# EAGLE board picoavr (EAGLE 6.5.0)
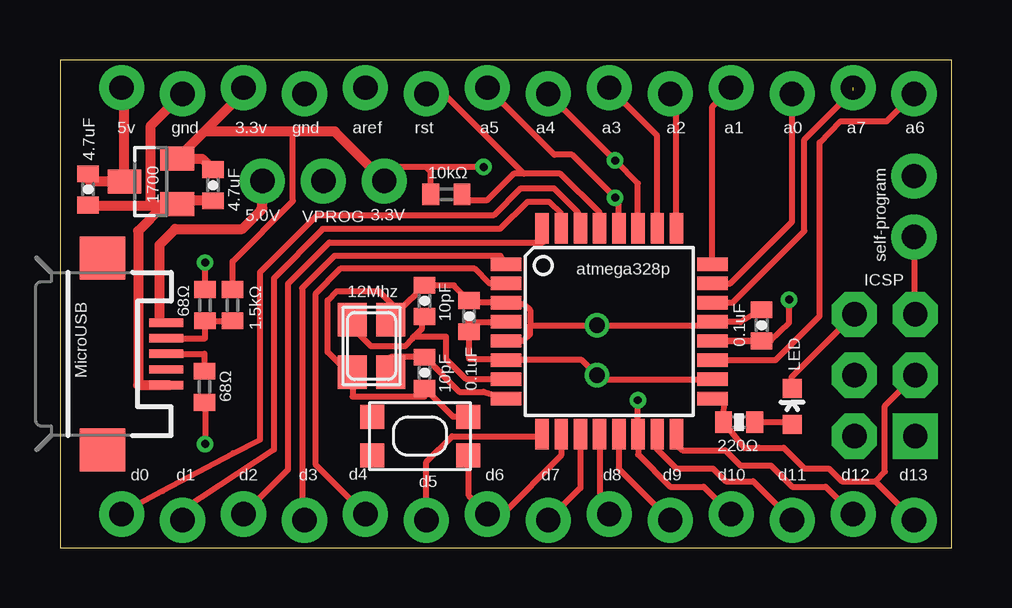
[diagram p0: board, top side]
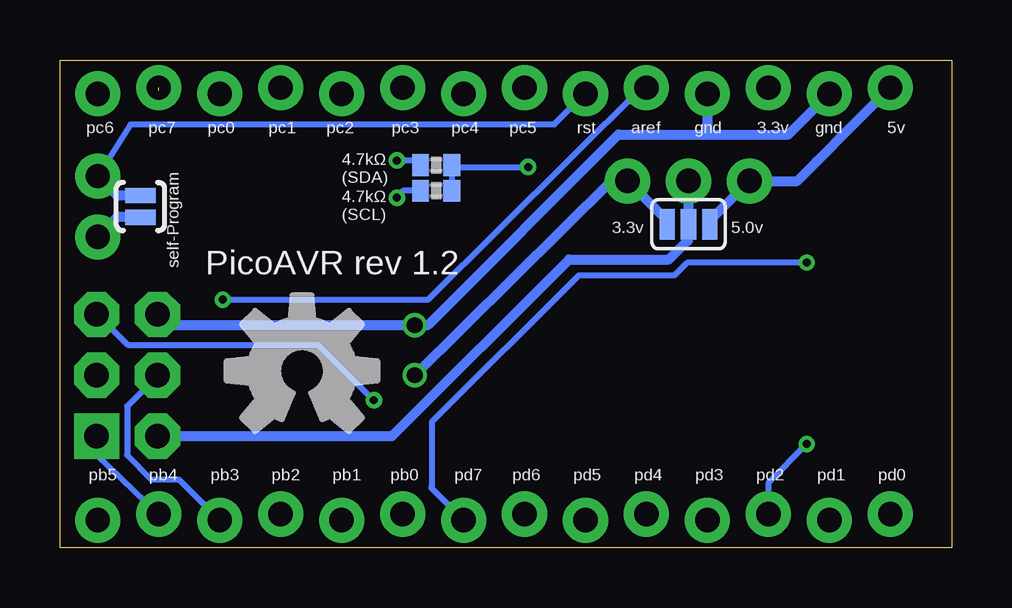
[diagram p1: board, bottom side, seen from below]

Size 37.16 x 20.34 mm. Coordinates in mm from the lower left corner, seen from the top.
Outline: 0,0 37.16,0 37.16,20.34 0,20.34 0,0
Copper layers (1*16): Top 0.0356mm / dielectric 1.5011mm / Bottom 0.0356mm
Design rules "LaenPCBOrder": minimum track width 6mil, minimum drill 13mil, track to track 6mil, track to pad 6mil, pad to pad 6mil, via to via 6mil, smd to smd 6mil, copper to edge 15mil, drill to drill 6mil, minimum pad ring 7mil, minimum via ring 7mil, stop-mask expansion 3mil, vias tented up to drill 0mil, thermal gap 10mil

## Footprints (pad centres in the part's own frame; a part is rotated, then mirrored left to right if it is on the bottom)
0402-CAP = smd 0.7 x 0.9: 1 -0.65,0; 2 0.65,0
SOT23 = smd 1 x 1.4: 1 -0.95,-1.1; 2 0.95,-1.1; 3 0,1.1
1X14_LOCK = drill 1.016 pad 1.88: 1 0,0.127; 2 2.54,-0.127; 3 5.08,0.127; 4 7.62,-0.127; 5 10.16,0.127; 6 12.7,-0.127; 7 15.24,0.127; 8 17.78,-0.127; 9 20.32,0.127; 10 22.86,-0.127; 11 25.4,0.127; 12 27.94,-0.127; 13 30.48,0.127; 14 33.02,-0.127
2X3-NS = drill 1.016 pad 1.88 square: 1 -2.54,-1.27 | drill 1.016 pad 1.88 octagon: 2 -2.54,1.27; 3 0,-1.27; 4 0,1.27; 5 2.54,-1.27; 6 2.54,1.27
LED-0603 = smd 0.8 x 0.8: A 0,-0.75; C 0,0.75
1X03_NO_SILK = drill 1.016 pad 1.88: 1 0,0; 2 2.54,0; 3 5.08,0
NX3225 = smd 1.4 x 1.2: 1 -1.1,-0.8; 2 1.1,-0.8; 3 1.1,0.8; 4 -1.1,0.8
0402-RES = smd 0.7 x 0.9: 1 -0.65,0; 2 0.65,0
R0402 = smd 0.7 x 0.9: 1 -0.65,0; 2 0.65,0
1X02 = drill 1.016 pad 1.88: 1 0,0; 2 2.54,0
SJ_3 = smd 0.635 x 1.27: 1 -0.889,0; 2 0,0; 3 0.889,0
SJ_2S-NO = smd 0.635 x 1.27: 1 -0.45,0; 2 0.45,0
KMR2 = smd 1 x 1: 1 2,0.8; 2 2,-0.8; 3 -2,0.8; 4 -2,-0.8
TQFP32-08 = smd 1.27 x 0.559: 1 -4.293,2.8; 2 -4.293,2; 3 -4.293,1.2; 4 -4.293,0.4; 5 -4.293,-0.4; 6 -4.293,-1.2; 7 -4.293,-2; 8 -4.293,-2.8; 17 4.293,-2.8; 18 4.293,-2; 19 4.293,-1.2; 20 4.293,-0.4; 21 4.293,0.4; 22 4.293,1.2; 23 4.293,2; 24 4.293,2.8 | smd 0.559 x 1.27: 9 -2.8,-4.293; 10 -2,-4.293; 11 -1.2,-4.293; 12 -0.4,-4.293; 13 0.4,-4.293; 14 1.2,-4.293; 15 2,-4.293; 16 2.8,-4.293; 25 2.8,4.293; 26 2,4.293; 27 1.2,4.293; 28 0.4,4.293; 29 -0.4,4.293; 30 -1.2,4.293; 31 -2,4.293; 32 -2.8,4.293
USB-MICROB = smd 0.35 x 1.4: D+ 0,2.65; D- -0.65,2.65; GND 1.3,2.65; ID 0.65,2.65; VBUS -1.3,2.65 | smd 1.8 x 1.9: MT1 -4,0; MT2 4,0

## Placement (x,y rotation side)
C1  4.7uF  [0402-CAP]  1.17,14.94 270 top
C2  4.7uF  [0402-CAP]  6.38,15.11 270 top
C3  10pf  [0402-CAP]  15.19,10.29 90 top
C4  10pf  [0402-CAP]  15.19,7.29 270 top
C5  0.1uF  [0402-CAP]  17.04,9.65 90 top
C6  0.1uF  [0402-CAP]  29.24,9.27 90 top
IC1  MCP1703CB  [SOT23]  3.78,15.27 90 top
JP2  M14LOCK  [1X14_LOCK]  2.57,1.27 0 top
JP3  M14LOCK  [1X14_LOCK]  2.57,19.05 0 top
JSP  [2X3-NS]  34.37,7.19 90 top
LED2  GREEN  [LED-0603]  30.51,5.89 0 top
POWER  [1X03_NO_SILK]  8.43,15.29 0 top
Q2  12mhz  [NX3225]  12.98,8.41 270 top
R1  4.7k  [0402-RES]  21.49,15.95 180 bottom
R2  4.7k  [0402-RES]  21.49,14.88 180 bottom
R3  68  [R0402]  6.05,10.11 90 top
R5  68  [R0402]  6.02,6.71 270 top
R6  10k  [R0402]  16.1,14.73 0 top
R7  1.5k  [R0402]  7.19,10.11 90 top
R9  220  [0402-RES]  28.3,5.23 0 top
SELF_PROGRAM  [1X02]  35.59,15.49 270 top
SJ1  [SJ_3]  10.97,13.49 180 bottom
SJ2  SOLDERJUMPERNO  [SJ_2S-NO]  33.81,14.22 270 bottom
SW1  SPST_TACT-KMR2  [KMR2]  15,4.65 0 top
U3  ATMEGA328P  [TQFP32-08]  22.89,9.02 0 top
X1  Micro USB  [USB-MICROB]  1.78,8.08 270 top

## Library data of the parts
C1 C2 LED2 R1 R2 R9 X1 = SparkFun
C3-C6 = SparkFun-Capacitors
IC1 = linear
JP2 JP3 JSP POWER = SparkFun-Connectors
Q2 SW1 = adafruit
R3 R5-R7 = resistor
SELF_PROGRAM SJ1 SJ2 = SparkFun-Passives
U3 = SparkFun-DigitalIC; PROD_ID: IC-09069

## Nets
A0: JP3.12 U3.23
A1: JP3.11 U3.24
A2: JP3.10 U3.25
A3: JP3.9 U3.26
A6: JP3.14 U3.19
A7: JP3.13 U3.22
AREF: C6.1 JP3.5 U3.20
B0: JP2.9 U3.12
B1: JP2.10 U3.13
D0: JP2.1 U3.30
D1: JP2.2 U3.31
D3: JP2.4 U3.1
D4: JP2.5 U3.2
D5: JP2.6 U3.9
D6: JP2.7 SW1.2 U3.10
GND: C1.2 C2.2 C3.2 C4.2 C5.2 C6.2 IC1.1 JP3.2 JP3.4 JSP.6 LED2.C Q2.2 Q2.4 SW1.1 U3.3 U3.5 U3.21 X1.GND
ISP_RESET: JP2.11 JSP.5 SELF_PROGRAM.2 SJ2.2 U3.14
MISO: JP2.13 JSP.1 U3.16
MOSI: JP2.12 JSP.4 U3.15
N$2: R5.1 X1.D+
N$4: R3.1 R7.1 X1.D-
N$5: C4.1 Q2.3 U3.8
N$6: C3.1 Q2.1 U3.7
N$11: LED2.A R9.2
RESET: JP3.6 R6.2 SELF_PROGRAM.1 SJ2.1 U3.29
SCK: JP2.14 JSP.3 R9.1 U3.17
SCL: JP3.7 R2.2 U3.28
SDA: JP3.8 R1.2 U3.27
USB_DMINUS: JP2.8 R3.2 U3.11
USB_DPLUS: JP2.3 R5.2 U3.32
USB_VBUS: C1.1 IC1.3 JP3.1 POWER.1 SJ1.1 X1.VBUS
VCC: C2.1 C5.1 IC1.2 JP3.3 POWER.3 R1.1 R2.1 R6.1 R7.2 SJ1.3 U3.4 U3.6 U3.18
VPROG: JSP.2 POWER.2 SJ1.2

## Tracks (layer width: path | path; a pad name or v marks a point on that pad's centre or on a via)
A0
  Top 0.254: U3.23 27.93,11.02 30.51,13.59 JP3.12
A1
  Top 0.254: U3.24 27.18,18.39 JP3.11
A2
  Top 0.254: U3.25 25.69,18.92 JP3.10
A3
  Top 0.254: U3.26 24.89,17.18 JP3.9
A6
  Top 0.254: U3.19 29.81,7.82 31.65,9.65 31.65,16.89 32.51,17.78 34.44,17.78 JP3.14
A7  (1 unrouted)
  Top 0.254: U3.22 28.02,10.22 31.01,13.21 31.01,17.02 33.05,19.05
AREF  (via drill 0.33)
  Top 0.254: C6.1 29.61,8.62 U3.20 26.95,8.64 29.62,8.64 30.38,9.37 v30.38,10.34
  Bottom 0.254: JP3.5 12.93,19.18 21.82,10.34 v30.38,10.34
B0
  Top 0.254: U3.12 22.49,1.42 JP2.9
B1
  Top 0.254: U3.13 23.29,3.28 JP2.10
D0
  Top 0.254: JP2.1 2.84,1.6 4.27,2.36 7.21,3.94 8.33,4.5 8.33,11.48 10.72,13.87 18.08,13.87 19.2,14.99 20.57,14.99 21.56,13.99 21.62,13.38 U3.30
D1
  Top 0.254: JP2.2 5.13,1.63 8.92,4.09 8.92,11.23 10.95,13.28 18.31,13.28 19.48,14.43 20.37,14.43 20.88,13.92 U3.31 20.85,13.34
D3
  Top 0.254: U3.1 18.46,11.68 18.46,11.89 18.36,12.17 11.43,12.17 10.08,10.82 10.08,1.17 JP2.4
D4
  Top 0.254: U3.2 17.89,11.02 17.27,11.63 11.68,11.63 10.64,10.57 10.64,3.48 JP2.5
D5
  Top 0.254: JP2.6 15.27,3.58 16.33,4.65 20.06,4.65 U3.9
D6
  Top 0.254: U3.10 20.89,3.84 18.44,1.4 JP2.7 17.04,2.16 17.04,3.81 SW1.2
GND  (via drill 0.66)
  Top 0.254: C6.2 29.25,9.92 28.35,9.4 27.2,9.4 U3.21 | 4.57,6.78 X1.GND | 19.58,9.27 19.58,9.91 19.33,10.16 18.82,10.16 U3.3 17.38,10.22 C5.2 16.41,10.94 C3.2 14.11,9.86 | U3.5 18.82,8.64 19.33,8.64 19.58,8.89 19.58,9.27 | 26.95,9.4 U3.21 | JSP.6 30.48,7.11 30.48,6.64 LED2.C | C4.2 14.87,6.64 | 12.19,7.29 Q2.2 | Q2.4 13.78,9.53 14.11,9.86 | 12.19,7.29 12.01,7.29 11.15,8.15 11.15,10.31 11.53,10.69 13.28,10.69 14.11,9.86 | 19.58,9.27 v22.38,9.27 27.18,9.27 U3.21 | C1.2 1.24,14.11 1.4,14.26 | 4.88,14.11 IC1.1 | IC1.1 4.38,14.29 | 5.09,14.46 IC1.1 | 12.19,7.29 12.19,6.3 15.19,6.3 C4.2 | SW1.1 16.38,5.45 C4.2
  Top 0.406: 4.57,6.78 3.25,6.78 3.25,13.21 4.31,14.26 | 4.38,14.29 3.78,14.3 3.78,17.6 JP3.2 | C2.2 5.09,14.46 | 4.31,14.26 4.36,14.31 IC1.1 | 1.4,14.26 4.31,14.26
  Bottom 0.152: 22.38,9.4 v22.38,9.27
  Bottom 0.406: JSP.6 32.64,9.27 v22.38,9.27 21.84,9.27 13.89,17.22 10.19,17.22 | 10.19,17.22 6.81,17.22 JP3.2 | JP3.4 10.19,17.22
ISP_RESET  (via drill 0.33)
  Top 0.254: JP2.11 26.82,2.54 25.43,2.54 24.09,3.88 U3.14 24.08,4.83 v24.08,6.15 | SELF_PROGRAM.2 35.59,9.78 JSP.5
  Bottom 0.254: JSP.5 34.34,8.46 26.39,8.46 v24.08,6.15
  Bottom 0.406: SJ2.2 34.77,13.77 SELF_PROGRAM.2
MISO
  Top 0.254: U3.16 25.69,4.31 25.93,4.06 27.71,4.06 28.35,3.43 29.62,3.43 30.51,2.54 31.9,2.54 JP2.13
  Bottom 0.254: JP2.13 35.64,3.86 JSP.1
MOSI
  Top 0.254: U3.15 24.89,4.1 25.68,3.3 27.2,3.3 27.74,2.77 28.88,2.77 JP2.12
  Bottom 0.254: JSP.4 33.1,7.16 34.37,5.89 34.37,3.86 33.35,2.85 32.21,2.85 JP2.12
N$2
  Top 0.254: X1.D+ 6.02,8.08 R5.1
N$4
  Top 0.254: X1.D- 6.05,8.73 R3.1 R7.1 7.21,9.46
N$5
  Top 0.254: U3.8 17.65,6.5 16.63,6.5 C4.1 13.78,7.94 Q2.3
N$6
  Top 0.254: 15.19,9.45 C3.1 15.09,9.54 15.09,9.14 14.76,8.81 | U3.7 18.57,7.04 16.92,7.04 16.08,7.87 16.08,8.79 14.78,8.79 14.76,8.81 | Q2.1 12.18,9.18 12.95,8.41 14.38,8.41 14.68,8.71 14.68,8.74 14.76,8.81
N$11
  Top 0.254: R9.2 30.51,5.23 LED2.A
RESET
  Top 0.152: 16.08,18.85 16.03,18.8 15.27,18.8 JP3.6
  Top 0.254: U3.29 22.49,13.96 20.85,15.6 19.33,15.6 | 19.33,15.6 18.9,15.6 17.78,14.48 17.01,14.48 R6.2 | 15.39,18.92 16,18.92 16.08,18.85 19.33,15.6
  Bottom 0.254: SELF_PROGRAM.1 34.21,17.65 16.56,17.65 JP3.6
  Bottom 0.406: SJ2.1 34.77,14.67 SELF_PROGRAM.1
SCK
  Top 0.254: U3.17 27.65,6.32 R9.1 28.51,4.16 29.13,4.17 30.15,4.17 31.01,3.3 32.03,3.3 32.56,2.77 33.96,2.77 | 33.96,2.77 JP2.14 | JSP.3 34.37,5.92 34.37,3.17 33.96,2.77
SCL  (via drill 0.33)
  Top 0.254: U3.28 23.29,14.43 v23.13,14.59 21.34,16.38 20.6,16.38 JP3.7
  Bottom 0.254: R2.2 22.86,14.88 v23.13,14.59
SDA  (via drill 0.33)
  Top 0.254: JP3.8 v23.13,16.14 24.08,15.19 U3.27
  Bottom 0.254: R1.2 22.18,16.14 v23.13,16.14
USB_DMINUS  (via drill 0.33)
  Top 0.254: U3.11 21.69,2.48 JP2.8 | R3.2 v6.05,11.89
  Bottom 0.254: JP2.8 21.69,2.48 21.69,2.49 | 21.69,2.49 21.69,2.54 21.67,2.55 21.67,2.48 21.69,2.49 | v6.05,11.89 11.02,11.89 11.56,11.35 15.54,11.35 21.64,5.26 21.67,5.26 21.67,2.66 21.69,2.49
USB_DPLUS  (via drill 0.33)
  Top 0.254: U3.32 20.09,13.7 20.12,12.72 11.23,12.72 9.5,11 9.5,3.25 JP2.3 | 6,4.31 v6.05,4.32 6.05,5.7 R5.2
  Bottom 0.254: v6.05,4.32 7.65,2.69 JP2.3
USB_VBUS
  Top 0.254: 4.14,9.46 X1.VBUS | 1.23,15.27 C1.1 | 2.68,19.06 JP3.1
  Top 0.406: 4.14,9.46 4.14,12.62 4.8,13.28 7.59,13.28 8.38,14.07 8.38,14.1 8.43,14.15 POWER.1 | 1.23,15.27 IC1.3 2.68,19.06
  Bottom 0.152: 4.09,17.53 4.15,17.59 | 8.31,15.29 POWER.1 | 5.61,16 5.64,16.1
  Bottom 0.254: 8.43,15.14 POWER.1
  Bottom 0.406: JP3.1 4.15,17.59 5.64,16.1 6.45,15.29 8.31,15.29 | SJ1.1 10.08,13.64 POWER.1
VCC  (via drill 0.33, 0.66)
  Top 0.254: U3.4 17.01,9.41 C5.1 17.04,7.87 18.57,7.87 U3.6 21.74,7.82 v22.38,7.19 22.56,7.01 U3.18 | 6.25,15.77 6.25,15.89 C2.1 | R7.2 7.19,11.94 9.7,14.45 9.7,17.35 | v17.65,15.88 15.27,15.88 | 15.27,15.88 14.1,15.88 POWER.3 | R6.1 15.45,15.69 15.27,15.88
  Top 0.406: JP3.3 7.65,18.97 7.64,18.97 6.02,17.35 | POWER.3 11.46,17.35 9.7,17.35 6.02,17.35 | IC1.2 4.88,16.42 | IC1.2 5.92,16.21 C2.1 | 6.02,17.35 IC1.2
  Bottom 0.254: 13.51,15.14 POWER.3 | v17.65,15.88 20.91,15.88 R1.1 R2.1
  Bottom 0.406: SJ1.3 11.86,13.64 POWER.3 14.2,15.29 v22.38,7.19
VPROG
  Bottom 0.406: POWER.2 SJ1.2 11,13.46 11,12.8 11.79,12.01 15.95,12.01 23.32,4.65 JSP.2

## Text on the board
_tsilk: 5v | gnd | 3.3v | gnd | aref | rst | a5 | a4 | a3 | a2 | a1 | a0 | a7 | a6 | 4.7uF | 10kΩ | 1700 | 4.7uF | 5.0V | VPROG | 3.3V | self-program | atmega328p | ICSP | 68Ω | 12Mhz | 1.5kΩ | 10pF | 0.1uF | MicroUSB | 0.1uF | LED | 68Ω | 10pF | 220Ω | d0 | d1 | d2 | d3 | d4 | d5 | d6 | d7 | d8 | d9 | d10 | d11 | d12 | d13
_bsilk: 5v | gnd | 3.3v | gnd | aref | rst | pc5 | pc4 | pc3 | pc2 | pc1 | pc0 | pc7 | pc6 | 4.7kΩ / (SDA) | 4.7kΩ / (SCL) | 5.0v | 3.3v | self-Program | PicoAVR rev 1.2 | pd0 | pd1 | pd2 | pd3 | pd4 | pd5 | pd6 | pd7 | pb0 | pb1 | pb2 | pb3 | pb4 | pb5